# Altium PCB SmartCanBus.PcbDoc
Units mil, origin at the board's own origin, x right, y up, seen from the top; angles counter-clockwise.
Board outline 1614.17 x 629.92 mil, 2 copper layers (Top Layer, Bottom Layer); 20 components, 19 nets, 117 pads, 21 vias.
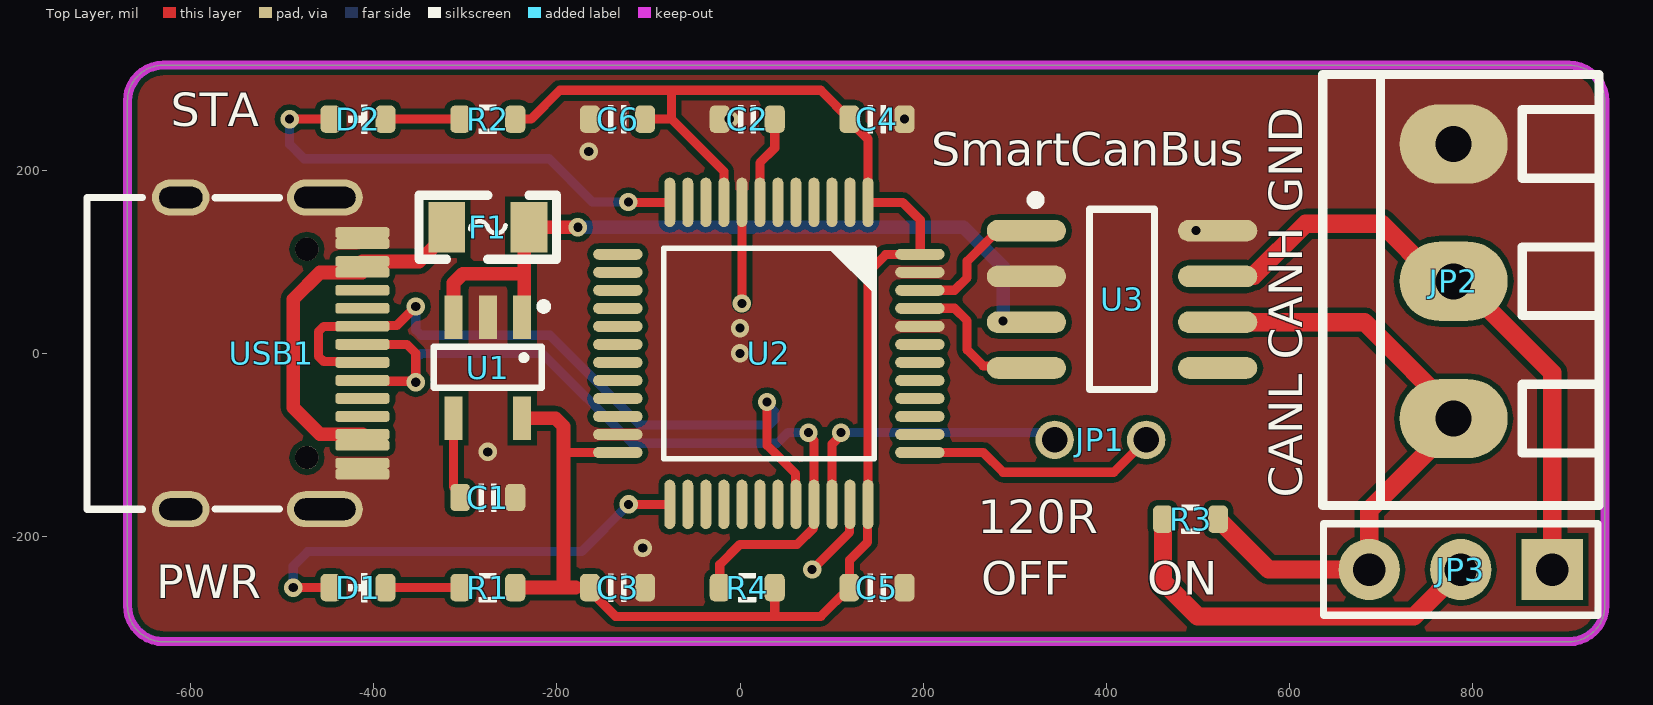
[diagram p0: Top Layer view]
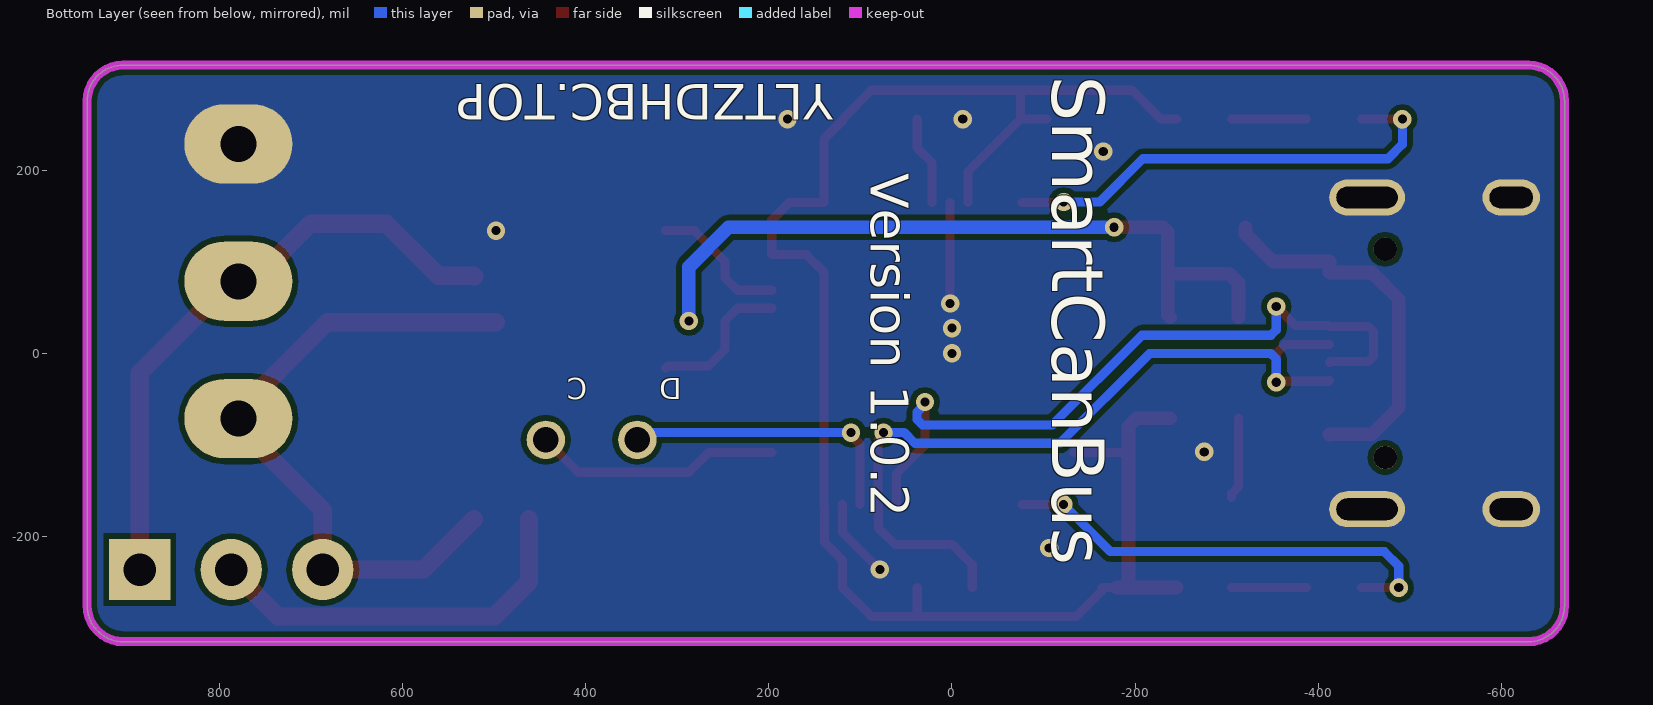
[diagram p1: Bottom Layer view, seen from below]

## Layer stack, top to bottom
Top Solder: solder mask 0.4, Solder Resist, Dk 3.5
Top Layer: signal copper 1.4
Dielectric 1: dielectric 12.6, FR-4, Dk 4.8
Bottom Layer: signal copper 1.4
Bottom Solder: solder mask 0.4, Solder Resist, Dk 3.5

## Board outline
-669.29,-275.59 ccw(c-629.92,-275.59) -629.92,-314.96 905.51,-314.96 ccw(c905.51,-275.59) 944.88,-275.59 944.88,275.59 ccw(c905.51,275.59) 905.51,314.96 -629.92,314.96 ccw(c-629.92,275.59) -669.29,275.59

## Design rules (kind name [scope] priority, off if disabled: settings)
Clearance [All] p1: gap=5 ignorepadtopadclearanceinfootprint=FALSE
DiffPairsRouting [All] p1: maxlimit=10 minlimit=5 mostfreqgap=10 toplayer_minwidth=5 toplayer_maxwidth=100 toplayer_prefwidth=6 bottomlayer_minwidth=5 bottomlayer_maxwidth=100 bottomlayer_prefwidth=6 maxuncoupledlength=500
HoleSize [All] p1: absolutevalues=TRUE maxlimit=1000 minlimit=1 maxpercent=80.000 minpercent=20.000
HoleToHoleClearance [All] p1: gap=2 allowstackedmicrovias=TRUE
MinimumSolderMaskSliver [All] p1: minsoldermaskwidth=4
PlaneConnect [All] p1: planeconnectstyle=Direct reliefexpansion=20 reliefentries=4 reliefconductorwidth=10 reliefairgap=10
PolygonConnect [All] p1: connectstyle=Direct reliefconductorwidth=10 reliefentries=4 polygonreliefangle="90 Angle" airgapwidth=10
RoutingVias [All] p1: holewidth=10 width=20 viastyle="Through Hole" minholewidth=6 minwidth=6 maxholewidth=30 maxwidth=50
SilkToSilkClearance [All] p1 off: silktosilkclearance=10
SilkToSolderMaskClearance [IsPad] p1 off: minsilkscreentomaskgap=10 clearancetoexposedcopper=TRUE
SolderMaskExpansion [All] p1: expansion=4 istentingtop=FALSE
Width [All] p1: maxlimit=100 minlimit=5 preferedwidth=6
23 further rules are at their usual default settings.

## Classes and differential pairs
differential pair USB: +USB_P -USB_N

## Components (designator, comment, footprint, x,y, rotation, side; value= is the part's Value field where it differs from the comment)
C1 "0.1uF" 0603_CAP -275.59,-157.48 r180 top value=0.1u
C2 "0.1uF" 0603_CAP 7.87,255.91 r0 top value=0.1u
C3 "0.1uF" 0603_CAP -133.86,-255.91 r0 top value=0.1u
C4 "0.1uF" 0603_CAP 149.61,255.91 r0 top value=0.1u
C5 "0.1uF" 0603_CAP 149.61,-255.91 r0 top value=0.1u
C6 "0.1uF" 0603_CAP -133.86,255.91 r180 top value=0.1u
D1 "LED-0603" 0603_LED_RED -417.32,-255.91 r180 top
D2 "LED-0603" 0603_LED_BLUE -417.32,255.91 r180 top
F1 "6V 0.5A" "FU 0805" -275.59,137.8 r0 top
JP1 "下载口2P" 下载口2P 393.7,-94.49 r0 top
JP2 "HDR-1X3" KF128-3.81-3P 779.53,78.74 r90 top
JP3 "HDR-1X3" HDR2.54-LI-3P 787.4,-236.22 r180 top
R1 "1K" 0603_RES -275.59,-255.91 r180 top
R2 "1K" 0603_RES -275.59,255.91 r180 top
R3 "1K" 0603_RES 492.13,-181.1 r0 top value=120R
R4 "1K5" 0603_RES 7.87,-255.91 r0 top
U1 "LP2992" SOT23-5N -275.59,-15.75 r180 top
U2 "STM32F072CBT6" LQFP-48 31.5,0 r270 top
U3 "TJA1050" "SOIC-8 - duplicate" 417.32,59.06 r0 top
USB1 "Type-C" Type-C-TOP -511.81,0 r180 top

## Footprints (in the part's own frame and the unit in brackets; to place one, negate y for a bottom-side part, rotate by r counter-clockwise, add the part's x,y. Pads: shape width x height; smd on the part's side, far side on the other; paste and mask are expansions set on the pad)
0603_CAP [mil]
  rrect50% 22x30 smd: 1(-30,0) 2(30,0)
  silkscreen extent -10,-15 10,15, body extent -31,-16 32,16, height 31
0603_LED_BLUE [mil]
  rrect50% 22x30 smd: 1(-30,0) 2(30,0)
  silkscreen extent -10,-16 10,16, body extent -32,-16 32,16, height 24
0603_LED_RED [mil]
  rrect50% 22x30 smd: 1(-30,0) 2(30,0)
  silkscreen extent -10,-16 10,16, body extent -31,-16 32,16, height 24
0603_RES [mil]
  rrect50% 22x30 smd: 1(-30,0) 2(30,0)
  silkscreen extent -10,-16 10,16, body extent -31,-16 31,16, height 18
"FU 0805" [mil] "贴片保险丝"
  rect 40x55 smd: 1(-45,0) 2(45,0)
  silkscreen extent -75,-35 75,35, body extent -39,-24 39,24, height 20
HDR2.54-LI-3P [mm] "排针，3脚"
  rect 1.7x1.7 hole 0.9: 1(-2.54,0)
  round 1.7 hole 0.9: 2(0,0) 3(2.54,0)
  silkscreen extent -3.81,-1.27 3.81,1.27, body extent -3.81,-1.27 3.81,1.27, height 8.5
KF128-3.81-3P [mm] "螺钉式接线端子，脚距3.81mm"
  oval 2.2x3 hole 1: 1(-3.81,0) 2(0,0) 3(3.81,0)
  silkscreen extent -6.22,-4.04 5.74,3.63, body extent -6.21,-3.9 5.72,3.5, height 8.55
LQFP-48 [mil]
  oval 54x12 smd: 1(-165,108.27) 2(-165,88.58) 3(-165,68.9) 4(-165,49.21) 5(-165,29.53) 6(-165,9.84) 7(-165,-9.84) 8(-165,-29.53) 9(-165,-49.21) 10(-165,-68.9) 11(-165,-88.58) 12(-165,-108.27) 25(165,-108.27) 26(165,-88.58) 27(165,-68.9) 28(165,-49.21) 29(165,-29.53) 30(165,-9.84) 31(165,9.84) 32(165,29.53) 33(165,49.21) 34(165,68.9) 35(165,88.58) 36(165,108.27)
  oval 12x54 smd: 13(-108.27,-165) 14(-88.58,-165) 15(-68.9,-165) 16(-49.21,-165) 17(-29.53,-165) 18(-9.84,-165) 19(9.84,-165) 20(29.53,-165) 21(49.21,-165) 22(68.9,-165) 23(88.58,-165) 24(108.27,-165) 37(108.27,165) 38(88.58,165) 39(68.9,165) 40(49.21,165) 41(29.53,165) 42(9.84,165) 43(-9.84,165) 44(-29.53,165) 45(-49.21,165) 46(-68.9,165) 47(-88.58,165) 48(-108.27,165)
  silkscreen extent -115,-115 115,115, body extent -177,-175 177,180, height 61
"SOIC-8 - duplicate" [mm]
  oval 2.2x0.6 smd: 1(-2.654,1.905) 2(-2.654,0.635) 3(-2.654,-0.635) 4(-2.654,-1.905) 5(2.654,-1.905) 6(2.654,-0.635) 7(2.654,0.635) 8(2.654,1.905)
  silkscreen extent -2.52,-2.5 0.9,2.88, body extent -3,-2.45 3,2.45, height 1.7
SOT23-5N [mm] "3x1.6x1.1mm(长宽高)  封装库来自淘宝卖家 ID：黄晶宝石"
  rect 0.5x1.2 smd: 1(-0.95,-1.4) 2(0,-1.4) 3(0.95,-1.4) 4(0.95,1.4) 5(-0.95,1.4)
  silkscreen extent -1.63,-1.78 1.5,0.56, body extent -1.5,-1.4 1.5,1.4, height 1.15
Type-C-TOP [mm]
  round 0.65 hole 0.65: 0(-0.98,2.89) 0(-0.98,-2.89)
  oval 1.6x1 hole 0.6 slot 1.2 at 0 deg: 1(2.52,4.325) 2(2.52,-4.325)
  oval 2.1x1 hole 0.6 slot 1.7 at 0 deg: 3(-1.48,-4.325) 4(-1.48,4.325)
  rrect50% 1.5x0.3 smd: A1(-2.52,-3.35) A4(-2.52,-2.55) A5(-2.52,-1.25) A6(-2.52,-0.25) A7(-2.52,0.25) A8(-2.52,1.25) A9(-2.52,2.55) A12(-2.52,3.35) B1(-2.52,3.05) B4(-2.52,2.25) B5(-2.52,1.75) B6(-2.52,0.75) B7(-2.52,-0.75) B8(-2.52,-1.75) B9(-2.52,-2.25) B12(-2.52,-3.05)
  silkscreen extent -0.22,-4.33 5.12,4.33, body extent -2.57,-4.48 5.18,4.48, height 3.26
下载口2P [mil]
  round 42 hole 28: 1(-50,0) 2(50,0)

## Part data
C1 C2 C3 C4 C5 C6: library part 电容-0603, "电容"
D1: library part 二极管-0603-RED, "发光二极管"
D2: library part 二极管-0603-BLUE, "发光二极管"
F1: library part FU, "贴片保险丝", BOM名称=贴片保险丝, 学习资源=https://shop463601444.taobao.com, 版权归属="封装库来自淘宝卖家 ID：黄晶宝石"
JP1: library part 接插件-下载口2P, "下载口2P SWD"
JP2 JP3: library part "Header 3", "3P接插件", BOM名称=3P接插件, 学习资源=https://shop463601444.taobao.com, 版权归属="封装库来自淘宝 ID：黄晶宝石"
R1 R2 R3 R4: library part 电阻-0603, "电阻"
U1: "电源芯片"
U2: "48MHZ Crotex-M0 32位单片机 LQFP-48_7x7x05P"
U3: "CAN芯片"
USB1: library part 接插件-USB-Type-C

## Via types
v1: diameter 20, hole 10, Top Layer to Bottom Layer, tented both sides, 21 vias

## Nets (pads, with @x,y where several pads share a name; then routed paths per layer and width w, separated by ;. In a path a pad name is that pad's centre, name@x,y a point inside that pad or via, vN(x,y) a via of type N, cw(c..) or ccw(c..) an arc to the next point about the centre after c; other vN are vias at no path point)
3.3V: C3.1 C4.1 C5.1 C6.1 R1.1 R2.1 R4.2 U1.5 U2.1 U2.9 U2.24 U2.36 U2.48 | length 1897.4
  Top Layer w10: R2.1 -228.35,255.91 -196.85,287.4 -74.8,287.4 ; -192.91,-106.3 -190.94,-108.27 U2.24 ; -179.61,-255.91 C3.1 -163.86,-259.63 -136.09,-287.4 35.43,-287.4 ; C6.1 -74.8,255.91 ; U2.9 -17.72,198.82 -74.8,255.91 ; R4.2 37.87,-284.96 35.43,-287.4 ; -74.8,255.91 -74.8,287.4 ; -74.8,287.4 88.11,287.4 C4.1 119.61,254.41 139.76,234.25 U2.1 177.52,165 196.85,145.67 196.85,108.62 U2.48 196.11,107.89 159.07,107.89 139.76,88.58 U2.36 139.38,-165.38 139.38,-206.13 119.61,-225.91 C5.1 88.11,-287.4 35.43,-287.4
  Top Layer w15: R1.1 -192.91,-255.91 ; U1.5 -201.7,-70.87 -192.91,-79.65 -192.91,-106.3 -192.91,-255.91 ; -179.61,-255.91 -192.91,-255.91
5V: F1.2 U1.1 U1.3 U3.3 | length 815.4
  Top Layer w15: U1.3 -312.99,76.77 -302.64,87.13 -235.85,87.13 ; U1.1 -235.85,41.71 -235.85,87.13 ; v1(-177.17,137.8) F1.2 -235.85,132.54 -235.85,87.13
  Bottom Layer w15: v1(-177.17,137.8) 244.09,137.8 287.4,94.49 v1(287.4,35.43)
5V_IN: F1.1 USB1.A4 USB1.A9 USB1.B4 USB1.B9 | length 417.5
  Top Layer w15: USB1.B4 -412.88,-88.3 -458.94,-88.3 -488.19,-59.05 -488.19,59.06 -458.94,88.3 -412.88,88.3 USB1.B9 USB1.A4 -350.49,100.39 -320.59,130.3 F1.1
CAN_H: JP2.2 JP3.1 U3.7 | length 672
  Top Layer w20: U3.7 522.5,84.75 561.13,84.75 618.11,141.73 700.79,141.73 758.46,84.06 782.09,84.06 887.4,-21.26 JP3.1
CAN_L: JP2.1 JP3.3 R3.2 U3.6 | length 727.3
  Top Layer w20: U3.6@498.19,34.06 682.09,34.06 787.4,-71.26 687.4,-171.26 JP3.3 577.24,-236.22 R3.2
CAN_RX: U2.45 U3.4 | length 161.8
  Top Layer w10: U2.45 234.25,49.21 248.03,35.43 248.03,3.94 265.67,-13.7 310.59,-13.7 U3.4
CAN_TX: U2.46 U3.1 | length 153.9
  Top Layer w10: U2.46 234.25,68.9 248.03,82.68 248.03,100.75 281.34,134.06 U3.1
GND: C1.1 C2.1 C3.2 C4.2 C5.2 C6.2 JP2.3 U1.2 U2.8 U2.23 U2.35 U2.44 U2.47 U3.2 U3.8 USB1.1 USB1.2 USB1.3 USB1.4 USB1.A1 USB1.A12 USB1.B1 USB1.B12 | length 198.8
  Top Layer w10: v1(1.97,54.5) U2.8 ; v1(78.74,-236.22) 119.7,-195.26 119.7,-165.38 U2.35
  other v1: -106.3,-212.6 -275.59,-107.61 0,0 0,27.56 498.19,134.06 -165.35,220.47 -11.81,255.91 179.61,255.91
LED1: D1.2 U2.25 | length 503.8
  Top Layer w10: v1(-488.19,-255.91) D1.2 ; v1(-121.69,-165) U2.25
  Bottom Layer w10: v1(-488.19,-255.91) -488.19,-232.28 -472.44,-216.54 -173.23,-216.54 v1(-121.69,-165)
LED2: D2.2 U2.12 | length 514
  Top Layer w10: v1(-492.13,255.91) D2.2 ; v1(-122.05,165.35) -121.69,165 U2.12
  Bottom Layer w10: v1(-492.13,255.91) -492.13,228.35 -476.38,212.6 -208.66,212.6 -161.42,165.35 v1(-122.05,165.35)
NetC1_2: C1.2 U1.4 | length 89.7
  Top Layer w10: U1.4 -312.99,-145.81 -305.59,-153.21 C1.2
NetC2_2: C2.2 U2.7 | length 97.6
  Top Layer w10: U2.7 21.65,208.13 37.87,224.35 C2.2
NetD1_1: D1.1 R1.2 | length 81.7
  Top Layer w10: D1.1 R1.2
NetD2_1: D2.1 R2.2 | length 81.7
  Top Layer w10: D2.1 R2.2
NetJP3_2: JP3.2 R3.1 | length 430.6
  Top Layer w20: R3.1 462.13,-249.53 500,-287.4 736.22,-287.4 JP3.2
SWCLK: JP1.2 U2.37 | length 270.9
  Top Layer w10: U2.37 265.75,-108.27 287.4,-129.92 408.27,-129.92 JP1.2
SWDIO: JP1.1 U2.34 | length 319.2
  Top Layer w10: U2.34 100.39,-99.16 110.24,-89.32 v1(110.24,-86.61)
  Bottom Layer w10: v1(110.24,-86.61) 335.83,-86.61 JP1.1
USB_N: U2.32 USB1.A7 USB1.B7 | length 806.1
  Top Layer w10: USB1.A7 -413.5,-8.94 -454.77,-8.94 -460.63,-3.08 -460.63,23.62 -454.72,29.53 USB1.B7 -411.69,30.43 -375.08,30.43 v1(-354.33,51.18) ; v1(29.53,-53.15) 29.53,-100.39 60.64,-131.51 60.64,-164.62 U2.32
  Bottom Layer w10: v1(-354.33,51.18) -354.33,25.7 -348.47,19.84 -207.63,19.84 -109.64,-78.15 32.2,-78.15 38.06,-72.29 38.06,-64.01 29.53,-55.48 v1(29.53,-53.15)
USB_P: R4.1 U2.33 USB1.A6 USB1.B6 | length 904.2
  Top Layer w10: USB1.B6 -411.69,-30.43 -355.39,-30.43 -354.33,-29.37 -354.33,0 -364.17,9.84 USB1.A6 ; R4.1 -22.13,-230.79 0,-208.66 62.4,-208.66 80.33,-190.74 80.33,-165.38 U2.33 80.71,-95.23 74.8,-89.32 v1(74.8,-86.61)
  Bottom Layer w10: v1(-354.33,-31.5) -354.33,-6.02 -348.47,-0.16 -215.92,-0.16 -117.93,-98.15 40.49,-98.15 52.2,-86.43 74.62,-86.43 v1(74.8,-86.61)
pads on no net: U2.2 U2.3 U2.4 U2.5 U2.6 U2.10 U2.11 U2.13 U2.14 U2.15 U2.16 U2.17 U2.18 U2.19 U2.20 U2.21 U2.22 U2.26 U2.27 U2.28 U2.29 U2.30 U2.31 U2.38 U2.39 U2.40 U2.41 U2.42 U2.43 U3.5 USB1.0 USB1.A5 USB1.A8 USB1.B5 USB1.B8

## Polygon pours and split planes (outlines as drawn)
GND on Bottom Layer "GND_L02_P002" (solid, remove dead copper, pour order 2): -669.29,354.33 984.25,354.33 984.25,-354.33 -669.29,-354.33
GND on Top Layer "GND_L01_P000" (solid, remove dead copper, pour order 0): -669.29,354.33 984.25,354.33 984.25,-354.33 -669.29,-354.33

## Keep-outs
Keep-Out Layer:
  the board outline again, w10

## Silkscreen, mask and mechanical layers (free items; w line width, h text height)
Top Overlay:
  text "STA" at -622.05,236.22 h62.99
  text "SmartCanBus" at 208.66,192.91 h62.99
  text "CANL CANH GND" at 625.98,-157.48 h62.99 r90
  text "120R" at 259.84,-208.66 h62.99
  text "OFF" at 263.78,-275.59 h62.99
  text "ON" at 444.88,-275.59 h62.99
  text "PWR" at -637.8,-279.53 h62.99
Bottom Overlay:
  text "YLTZDHBC.TOP" at 129.92,307.09 h66.93 r180
  text "SmartCanBus" at -90.55,303.15 h98.43 r90
  text "Version 1.0.2" at 102.36,196.85 h70.87 r90
  text "D        C" at 295.28,-19.68 h39.37 r180